# EAGLE board StyroCutter-556-heatsink-5V (EAGLE 7.6.0)
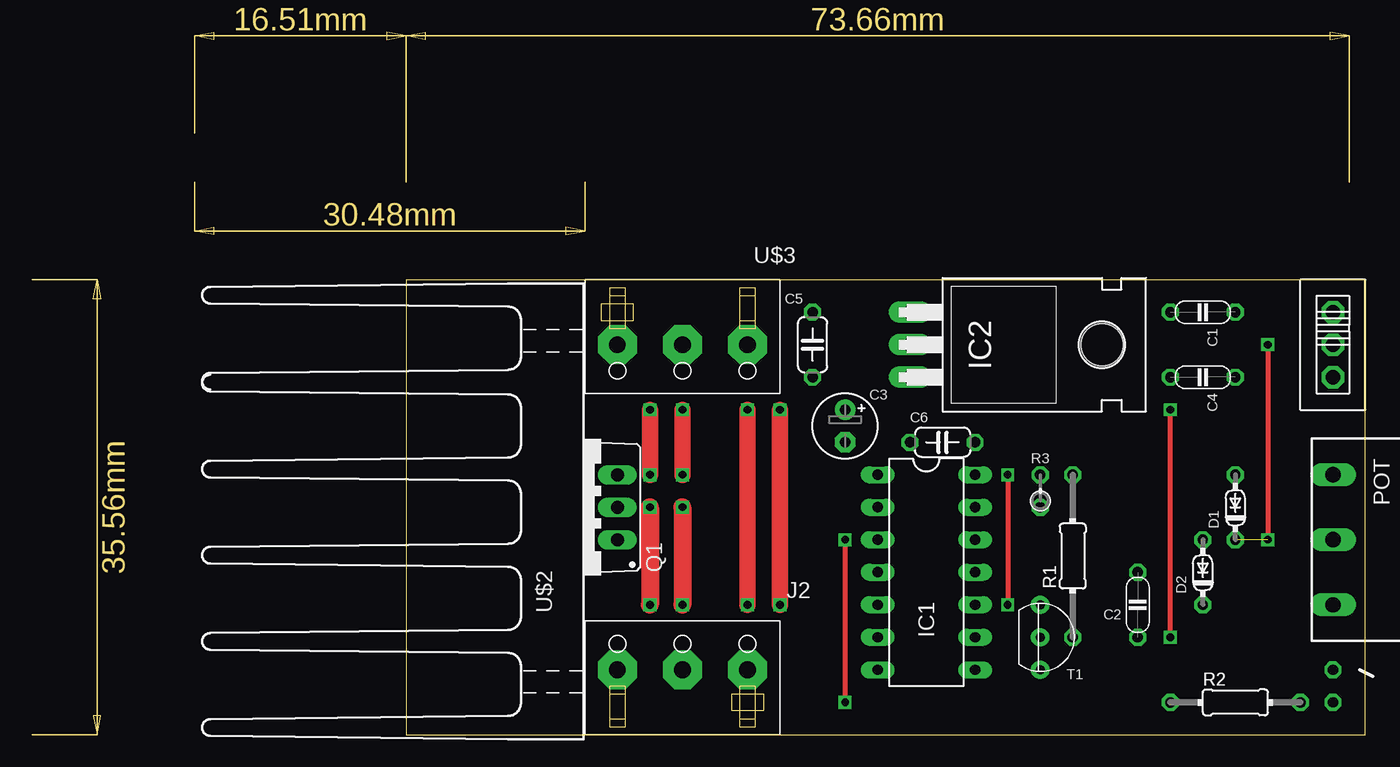
[diagram p0: board, top side]
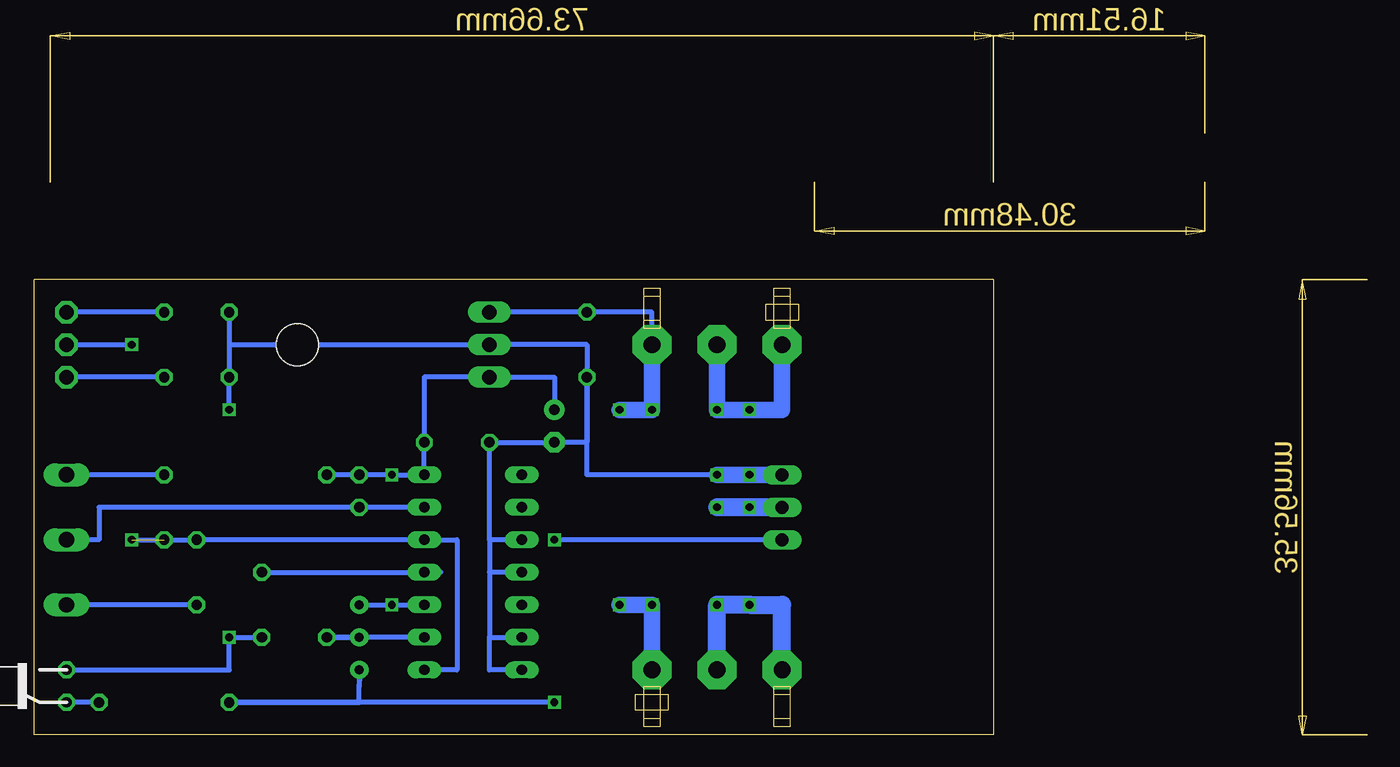
[diagram p1: board, bottom side, seen from below]

Size 74.91 x 35.56 mm. Coordinates in mm from the lower left corner, seen from the top.
Outline: 0,0 74.91,0 74.91,35.56 0,35.56 0,0
Copper layers (1*16): Top 0.035mm / dielectric 1.5mm / Bottom 0.035mm
Design rules "default": minimum track width 10mil, minimum drill 24mil, track to track 8mil, track to pad 8mil, pad to pad 8mil, via to via 8mil, smd to smd 8mil, copper to edge 40mil, drill to drill 8mil, minimum pad ring 10mil, minimum via ring 8mil, stop-mask expansion 4mil, vias tented up to drill 0mil, thermal gap 10mil
Net classes: 0 GND: width 1.219 mm, clearance 0.635 mm

## Footprints (pad centres in the part's own frame; a part is rotated, then mirrored left to right if it is on the bottom)
C050-020X036 = drill 0.813 octagon: 1 0,2.54; 2 0,-2.54
E2,5-5 = drill 0.813 pad 1.6: + -1.27,0 | drill 0.813 pad 1.6 octagon: - 1.27,0
C050-024X044 = drill 0.813 octagon: 1 -2.54,0; 2 2.54,0
DO34-5 = drill 0.813 octagon: A 2.54,0; C -2.54,0
DIL14 = drill 0.813 long: 1 -7.62,-3.81; 2 -5.08,-3.81; 3 -2.54,-3.81; 4 0,-3.81; 5 2.54,-3.81; 6 5.08,-3.81; 7 7.62,-3.81; 8 7.62,3.81; 9 5.08,3.81; 10 2.54,3.81; 11 0,3.81; 12 -2.54,3.81; 13 -5.08,3.81; 14 -7.62,3.81
TO220H = drill 1.118 long: 1 -2.54,-10.16; 2 0,-10.16; 3 2.54,-10.16 | hole 3.302: 0,4.826
CON-MIGROS-3PIN = drill 1.3 pad 3.048 octagon: 1 -5.08,0; 2 0,0; 3 5.08,0
PC16S = drill 1.2 long: 1A -5.08,2.54; 1E 5.08,2.54; 1S 0,2.54
TO220BV = drill 1.016 long: D 0,-2.54; G -2.54,-2.54; S 2.54,-2.54
0204/12 = drill 0.813 octagon: 1 -6.35,0; 2 6.35,0
0204/10 = drill 0.813 octagon: 1 -5.08,0; 2 5.08,0
0202/2V = drill 0.813 octagon: 1 0,-1.27; 2 0,1.27
SLSW-1P2T = drill 1.118 pad 1.778 octagon: 1 0,2.54; 2 0,0; 3 0,-2.54
TO92-CBE = drill 0.7 pad 1.422: B 0,0; C -2.54,0; E 2.54,0
LED-3MM-V = drill 0.8 octagon: A 0,1.27; C 0,-1.27

## Placement (x,y rotation side)
C1  4.7nF  [C050-020X036]  62.23,33.02 270 top
C2  10nF  [C050-020X036]  57.15,10.16 180 top
C3  47uF/35V  [E2,5-5]  34.29,24.13 270 top
C4  100nF  [C050-020X036]  62.23,27.94 270 top
C5  0.33uF  [C050-024X044]  31.75,30.48 270 top
C6  0.1uF  [C050-024X044]  41.91,22.86 180 top
D1  1N4148  [DO34-5]  64.77,17.78 90 top
D2  1N4148  [DO34-5]  62.23,12.7 90 top
IC1  NE556  [DIL14]  40.64,12.7 270 top
IC2  7805T  [TO220H]  49.53,30.48 270 top
J2  PCON3_MIGROS  [CON-MIGROS-3PIN]  21.59,5.08 0 top
POT  2.5M  [PC16S]  74.93,15.24 90 top
Q1  IRFB3207ZPbF  [TO220BV]  13.97,17.78 90 top
R1  10k  [0204/12]  52.07,13.97 90 top
R2  1k  [0204/10]  64.77,2.54 0 top
R3  1k  [0202/2V]  49.53,19.05 0 top
SW1  SL-SW-1P-2T  [SLSW-1P2T]  72.39,30.48 0 top
T1  BC547  [TO92-CBE]  49.53,7.62 270 top
U$2  AQ-SO  [AQ_HS_3A_SO]  11.43,17.78 90 top
U$3  PCON3  [CON-MIGROS-3PIN]  21.59,30.48 180 top
U$4  LED-3MM-V  [LED-3MM-V]  72.39,3.81 180 bottom

## Library data of the parts
C1 C2 C4-C6 = c
C3 = rcl
D1 D2 = d
IC1 = ne555-556
IC2 = linear
J2 U$3 = print-conn
POT = piher-pt16
Q1 = power-mosfet
R1-R3 = r
SW1 = sw
T1 = t
U$2 = heatsink
U$4 = led

## Nets
+12V: C5.1 IC2.1 J2.3 U$3.1
GND: C1.2 C2.1 C3.- C4.2 C5.2 C6.2 IC1.3 IC1.4 IC1.6 IC1.7 IC2.2 Q1.S U$3.2 U$3.3 U$4.C
N$1: D2.C POT.1A
N$2: D1.A POT.1E
N$3: IC1.9 R1.1 T1.B
N$4: C4.1 SW1.3
N$5: C2.2 IC1.11
N$6: IC1.13 POT.1S R3.1
N$7: Q1.G R2.1 T1.E
N$8: D1.C D2.A IC1.8 IC1.12 SW1.2
N$9: C1.1 SW1.1
N$11: R2.2 U$4.A
PWM: J2.1 J2.2 Q1.D
V+: C3.+ C6.1 IC1.10 IC1.14 IC2.3 R1.2 R3.2 T1.C

## Tracks (layer width: path | path; a pad name or v marks a point on that pad's centre or on a via)
+12V  (via drill 0.6)
  Top 1.27: v26.67,10.16 v26.67,25.4 | v29.21,10.16 v29.21,25.4
  Bottom 0.406: IC2.1 C5.1 26.67,33.02 U$3.1
  Bottom 1.27: J2.3 v26.67,10.16 v29.21,10.16 | U$3.1 v26.67,25.4 v29.21,25.4
GND  (via drill 0.6)
  Top 0.406: v59.69,7.62 v59.69,25.4
  Top 1.27: v21.59,25.4 v21.59,20.32 | v19.05,25.4 v19.05,20.32
  Bottom 0.406: C1.2 59.69,30.48 | 59.69,30.48 IC2.2 31.75,30.48 C5.2 | v21.59,20.32 31.75,20.32 C5.2 | U$4.C 59.69,5.08 v59.69,7.62 C2.1 | 39.37,15.24 C6.2 C3.- 31.75,22.86 C5.2 | IC1.3 39.37,15.24 | 39.37,15.24 39.37,12.7 | IC1.4 39.37,12.7 | 39.37,12.7 39.37,7.62 | 39.37,7.62 IC1.6 | IC1.7 39.37,5.08 39.37,7.62 | v59.69,25.4 C4.2 59.69,30.48
  Bottom 1.27: U$3.2 v21.59,25.4 v19.05,25.4 16.51,25.4 U$3.3 | v21.59,20.32 v19.05,20.32 Q1.S
N$1
  Bottom 0.406: D2.C POT.1A
N$2
  Bottom 0.406: D1.A POT.1E
N$3
  Bottom 0.406: IC1.9 R1.1 T1.B
N$4
  Bottom 0.406: C4.1 SW1.3
N$5
  Bottom 0.406: C2.2 IC1.11 43.18,12.7
N$6
  Bottom 0.406: POT.1S 69.85,15.24 69.85,17.78 R3.1 IC1.13
N$7  (via drill 0.6)
  Top 0.406: v34.29,15.24 v34.29,2.54
  Bottom 0.406: Q1.G v34.29,15.24 | v34.29,2.54 R2.1 49.53,2.54 49.53,3.81 | 49.53,3.81 49.4,4.95 | 49.4,4.95 T1.E | 49.4,4.95 49.91,5.08 T1.E | T1.E 49.53,3.81
N$8  (via drill 0.6)  (1 unrouted)
  Top 0.406: v67.31,30.48 v67.31,15.24
  Bottom 0.406: IC1.8 41.91,5.08 41.91,15.24 IC1.12 D2.A v67.31,15.24 | SW1.2 v67.31,30.48
N$9
  Bottom 0.406: C1.1 SW1.1
N$11
  Bottom 0.406: R2.2 U$4.A
PWM  (via drill 0.6)
  Top 1.422: v21.59,17.78 v21.59,10.16 | v19.05,17.78 v19.05,10.16
  Bottom 1.422: Q1.D v21.59,17.78 | J2.2 v21.59,10.16 v19.05,10.16 16.51,10.16 J2.1
V+  (via drill 0.6)
  Top 0.406: v46.99,20.32 v46.99,10.16
  Bottom 0.406: 40.64,27.94 IC2.3 | IC2.3 44.45,27.94 C6.1 IC1.14 v46.99,20.32 | T1.C v46.99,10.16 IC1.10 | v46.99,20.32 R1.2 | v46.99,20.32 R3.2 | IC2.3 34.29,27.94 C3.+

## Text on the board
Document: IN- | IN+ | OUT- | OUT+